# Altium PCB QV-601-Contril.pcbdoc (part 1 of 2)
Units mm, origin at the board's own origin, x right, y up, seen from the top; angles counter-clockwise.
Board outline 150.03 x 60.03 mm, 2 copper layers (TOP, BOTTOM), stack 0.264 mm thick; 44 components, 19 nets, 132 pads, 668 vias.
Unrouted connection lines stored in the file: 3.
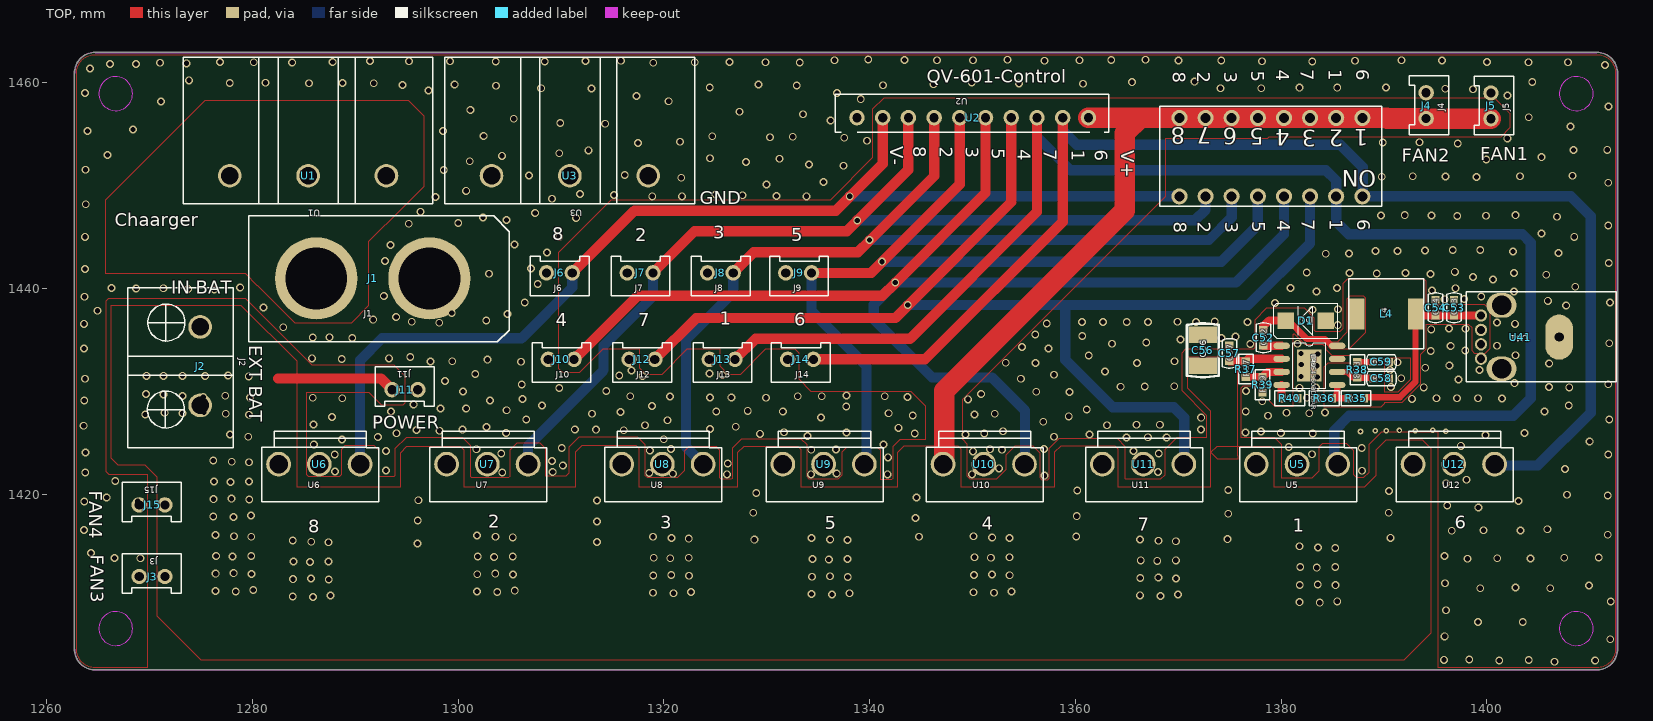
[diagram p0: TOP view]
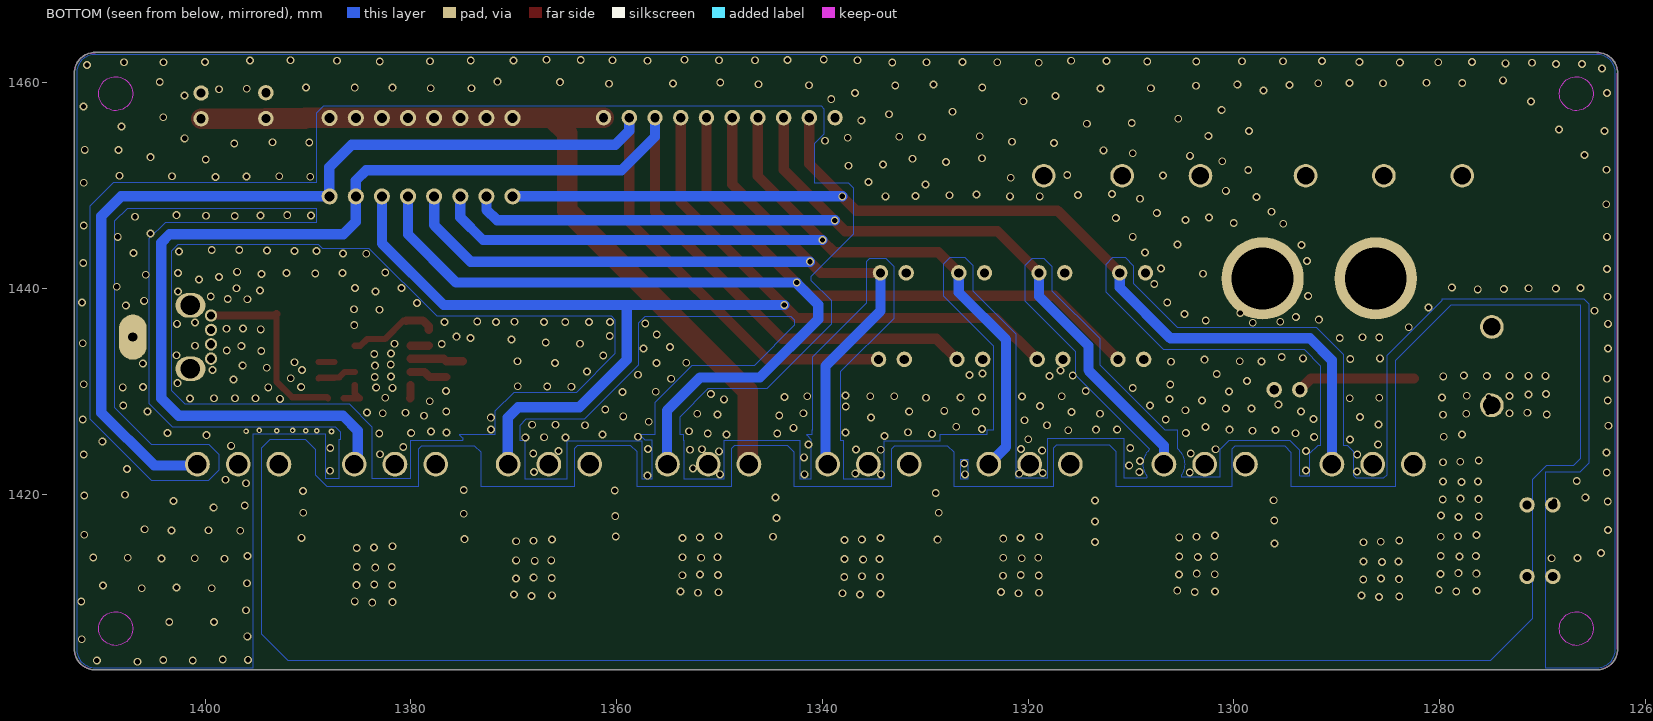
[diagram p1: BOTTOM view, seen from below]

## Layer stack, top to bottom
Top Solder: solder mask 0.0102, Solder Resist, Dk 3.5
TOP: signal copper 0.0305
Dielectric 1: core 0.2032, FR-4, Dk 4.5
BOTTOM: signal copper 0.0305
Bottom Solder: solder mask 0.0102, Solder Resist, Dk 3.5

## Board outline
1262.692,1404.949 ccw(c1264.705,1404.949) 1264.705,1402.936 1410.705,1402.936 ccw(c1410.705,1404.949) 1412.717,1404.949 1412.717,1460.949 ccw(c1410.705,1460.949) 1410.705,1462.962 1264.705,1462.962 ccw(c1264.705,1460.949) 1262.692,1460.949

## Design rules (kind name [scope] priority, off if disabled: settings)
AssemblyTestPointUsage [All] p0: scope1count=1 scope1_0_kind=Board scope1_0_value=Board scope2count=1 scope2_0_kind=Board scope2_0_value=Board commentlength=0
AssemblyTestpoint [All] p0: scope1count=1 scope1_0_kind=Board scope1_0_value=Board scope2count=1 scope2_0_kind=Board scope2_0_value=Board commentlength=0
Clearance [All] p0: scope1count=1 scope1_0_kind=Board scope1_0_value=Board scope2count=1 scope2_0_kind=Board scope2_0_value=Board commentlength=0 gap=0.254
Clearance [All] p1: gap=0.254 ignorepadtopadclearanceinfootprint=FALSE except(0: Arc-Hole Track-Hole SMDPad-Hole THPad-Hole Via-Hole Fill-Hole Poly-Hole Region-Hole Text-Hole)
ComponentClearance [All] p0: scope1count=1 scope1_0_kind=Board scope1_0_value=Board scope2count=1 scope2_0_kind=Board scope2_0_value=Board commentlength=0 gap=0.254 collisioncheckmode=3
DiffPairsRouting [All] p0: scope1count=1 scope1_0_kind=Board scope1_0_value=Board scope2count=1 scope2_0_kind=Board scope2_0_value=Board commentlength=0
FabricationTestPointUsage [All] p0: scope1count=1 scope1_0_kind=Board scope1_0_value=Board scope2count=1 scope2_0_kind=Board scope2_0_value=Board commentlength=0 valid=0 allowmultiple=FALSE
FabricationTestpoint [All] p0: scope1count=1 scope1_0_kind=Board scope1_0_value=Board scope2count=1 scope2_0_kind=Board scope2_0_value=Board commentlength=0 side=3 testpointundercomponent=TRUE minsize=1.016 maxsize=2.54 preferedsize=1.524 minholesize=0 maxholesize=1.016 preferedholesize=0.813 testpointgrid=0.025
FanoutControl Fanout_Default [All] p0: scope1count=1 scope1_0_kind=Board scope1_0_value=Board scope2count=1 scope2_0_kind=Board scope2_0_value=Board commentlength=30 // Fanout_Default (Default Rule)
FanoutControl Fanout_Small [All] p0 off: scope1count=1 scope1_0_kind=Board scope1_0_value=Board scope2count=1 scope2_0_kind=Board scope2_0_value=Board commentlength=84 // Protel DXP Scope 1 Expression Was: (CompPinCount < 5)   Fanout_Small (Default Rule)
FanoutControl Fanout_SOIC [All] p0 off: scope1count=1 scope1_0_kind=Board scope1_0_value=Board scope2count=1 scope2_0_kind=Board scope2_0_value=Board commentlength=71 // Protel DXP Scope 1 Expression Was: IsSOIC   Fanout_SOIC (Default Rule)
FanoutControl Fanout_LCC [All] p0 off: scope1count=1 scope1_0_kind=Board scope1_0_value=Board scope2count=1 scope2_0_kind=Board scope2_0_value=Board commentlength=69 // Protel DXP Scope 1 Expression Was: IsLCC   Fanout_LCC (Default Rule)
FanoutControl Fanout_BGA [All] p0 off: scope1count=1 scope1_0_kind=Board scope1_0_value=Board scope2count=1 scope2_0_kind=Board scope2_0_value=Board commentlength=69 // Protel DXP Scope 1 Expression Was: IsBGA   Fanout_BGA (Default Rule)
Height [All] p0: scope1count=1 scope1_0_kind=Board scope1_0_value=Board scope2count=1 scope2_0_kind=Board scope2_0_value=Board commentlength=0
HoleSize [All] p0: scope1count=1 scope1_0_kind=Board scope1_0_value=Board scope2count=1 scope2_0_kind=Board scope2_0_value=Board commentlength=0 absolutevalues=TRUE maxlimit=2.54 minlimit=0.025 maxpercent=80.000 minpercent=20.000
HoleToHoleClearance [All] p0: scope1count=1 scope1_0_kind=Board scope1_0_value=Board scope2count=1 scope2_0_kind=Board scope2_0_value=Board commentlength=0
LayerPairs [All] p0: scope1count=1 scope1_0_kind=Board scope1_0_value=Board scope2count=1 scope2_0_kind=Board scope2_0_value=Board commentlength=0 enforce=TRUE
MinimumSolderMaskSliver [All] p0: scope1count=1 scope1_0_kind=Board scope1_0_value=Board scope2count=1 scope2_0_kind=Board scope2_0_value=Board commentlength=0
NetAntennae [All] p0: scope1count=1 scope1_0_kind=Board scope1_0_value=Board scope2count=1 scope2_0_kind=Board scope2_0_value=Board commentlength=0
PasteMaskExpansion [All] p0: scope1count=1 scope1_0_kind=Board scope1_0_value=Board scope2count=1 scope2_0_kind=Board scope2_0_value=Board commentlength=0 expansion=0
PlaneClearance [All] p0: scope1count=1 scope1_0_kind=Board scope1_0_value=Board scope2count=1 scope2_0_kind=Board scope2_0_value=Board commentlength=0 clearance=0.508
PlaneConnect [All] p0: scope1count=1 scope1_0_kind=Board scope1_0_value=Board scope2count=1 scope2_0_kind=Board scope2_0_value=Board commentlength=0 planeconnectstyle=Direct reliefexpansion=0.508 reliefentries=4 reliefconductorwidth=0.254 reliefairgap=0.254
PlaneConnect [All] p1: planeconnectstyle=Direct reliefexpansion=0.508 reliefentries=4 reliefconductorwidth=0.254 reliefairgap=0.254
PolygonConnect [All] p0: scope1count=1 scope1_0_kind=Board scope1_0_value=Board scope2count=1 scope2_0_kind=Board scope2_0_value=Board commentlength=0 connectstyle=Direct reliefconductorwidth=0.254 reliefentries=4 polygonreliefangle="90 Angle"
PolygonConnect [All] p1: connectstyle=Direct reliefconductorwidth=0.254 reliefentries=4 polygonreliefangle="90 Angle" airgapwidth=0.254
RoutingCorners [All] p0: scope1count=1 scope1_0_kind=Board scope1_0_value=Board scope2count=1 scope2_0_kind=Board scope2_0_value=Board commentlength=0 cornerstyle=45-Degree minsetback=2.54 maxsetback=2.54
RoutingLayers [All] p0: scope1count=1 scope1_0_kind=Board scope1_0_value=Board scope2count=1 scope2_0_kind=Board scope2_0_value=Board commentlength=0 top layer=Automatic bottom layer=Automatic
RoutingPriority [All] p0: scope1count=1 scope1_0_kind=Board scope1_0_value=Board scope2count=1 scope2_0_kind=Board scope2_0_value=Board commentlength=0
RoutingTopology [All] p0: scope1count=1 scope1_0_kind=Board scope1_0_value=Board scope2count=1 scope2_0_kind=Board scope2_0_value=Board commentlength=0 topology=Shortest
RoutingVias [All] p0: scope1count=1 scope1_0_kind=Board scope1_0_value=Board scope2count=1 scope2_0_kind=Board scope2_0_value=Board commentlength=0 holewidth=0.711 width=1.27 viastyle="Through Hole" minholewidth=0.711 minwidth=1.27 maxholewidth=0.711 maxwidth=1.27
RoutingVias [All] p1: holewidth=0.711 width=1.27 viastyle="Through Hole" minholewidth=0.711 minwidth=1.27 maxholewidth=0.711 maxwidth=1.27
ShortCircuit [All] p0: scope1count=1 scope1_0_kind=Board scope1_0_value=Board scope2count=1 scope2_0_kind=Board scope2_0_value=Board commentlength=0 allowed=FALSE
SilkToBoardRegionClearance [All] p0: scope1count=1 scope1_0_kind=Board scope1_0_value=Board scope2count=1 scope2_0_kind=Board scope2_0_value=Board commentlength=0
SilkToSilkClearance [All] p0: scope1count=1 scope1_0_kind=Board scope1_0_value=Board scope2count=1 scope2_0_kind=Board scope2_0_value=Board commentlength=0
SilkToSolderMaskClearance [All] p0 off: scope1count=1 scope1_0_kind=Board scope1_0_value=Board scope2count=1 scope2_0_kind=Board scope2_0_value=Board commentlength=44 // Protel DXP Scope 1 Expression Was: IsPad
SolderMaskExpansion [All] p0: scope1count=1 scope1_0_kind=Board scope1_0_value=Board scope2count=1 scope2_0_kind=Board scope2_0_value=Board commentlength=0 expansion=0.102
SolderMaskExpansion [All] p1: expansion=0.102
UnRoutedNet [All] p0: scope1count=1 scope1_0_kind=Board scope1_0_value=Board scope2count=1 scope2_0_kind=Board scope2_0_value=Board commentlength=0
UnpouredPolygon [All] p0: scope1count=1 scope1_0_kind=Board scope1_0_value=Board scope2count=1 scope2_0_kind=Board scope2_0_value=Board commentlength=0
Width [All] p0: scope1count=1 scope1_0_kind=Board scope1_0_value=Board scope2count=1 scope2_0_kind=Board scope2_0_value=Board commentlength=0 maxlimit=0.254 minlimit=0.254 preferedwidth=0.254
Width [All] p1: maxlimit=0.254 minlimit=0.254 preferedwidth=0.254 impedancedriven=TRUE minimp=72.060000 maximp=72.060000 favimp=72.060000
29 further rules are at their usual default settings.

## Components (designator, comment, footprint, x,y, rotation, side; value= is the part's Value field where it differs from the comment)
C52 "CAP NP_C0603_100NF" C0603 1378.275,1435.225 r90 top
C53 "CAP NP_C0603_10UF/10V" C0603 1396.817,1438.146 r90 top
C54 "CAP NP_C0603_10UF/10V" C0603 1395.013,1438.146 r90 top
C56 "CAP NP_C1210_10UF/50V" C1210 1372.407,1433.998 r90 top
C57 "CAP NP_C0603_100NF" C0603 1374.973,1433.701 r90 top
C58 "CAP NP_C0603_100NF" C0603 1389.755,1431.262 r180 top
C59 "CAP NP_C0603_100NF" C0603 1389.755,1432.863 r180 top
D1 "SS54_SMA_SS34" SMA 1382.394,1436.876 r180 top
J1 "CON2_XT90PBM_XT90PB-M" XT90PBM 1286.207,1440.986 r0 top
J2 "CON2_DBT50G-7R62-2P1_DBT50G-7.6" DBT50G-7R62-2P1 1274.922,1436.266 r270 top
J3 "CON2_XH2R54-21_ZX-XH2.54-2PZZ" XH2R54-21 1271.493,1412.009 r180 top
J4 "CON2_XH2R54-21_ZX-XH2.54-2PZZ" XH2R54-21 1394.099,1456.535 r90 top
J5 "CON2_XH2R54-21_ZX-XH2.54-2PZZ" XH2R54-21 1400.398,1456.51 r90 top
J6 "CON2_XH2R54-21_ZX-XH2.54-2PZZ" XH2R54-21 1308.592,1441.524 r0 top
J7 "CON2_XH2R54-21_ZX-XH2.54-2PZZ" XH2R54-21 1316.44,1441.524 r0 top
J8 "CON2_XH2R54-21_ZX-XH2.54-2PZZ" XH2R54-21 1324.238,1441.524 r0 top
J9 "CON2_XH2R54-21_ZX-XH2.54-2PZZ" XH2R54-21 1331.858,1441.524 r0 top
J10 "CON2_XH2R54-21_ZX-XH2.54-2PZZ" XH2R54-21 1308.769,1433.117 r0 top
J11 "CON2_XH2R54-21_ZX-XH2.54-2PZZ" XH2R54-21 1296.08,1430.17 r180 top
J12 "CON2_XH2R54-21_ZX-XH2.54-2PZZ" XH2R54-21 1316.618,1433.117 r0 top
J13 "CON2_XH2R54-21_ZX-XH2.54-2PZZ" XH2R54-21 1324.416,1433.117 r0 top
J14 "CON2_XH2R54-21_ZX-XH2.54-2PZZ" XH2R54-21 1332.036,1433.117 r0 top
J15 "CON2_XH2R54-21_ZX-XH2.54-2PZZ" XH2R54-21 1271.493,1418.969 r180 top
L4 "JLSHC0630_3R3M_L0650_CYA0650-22" L0650 1387.368,1437.536 r90 top
R35 "R2_R0603_42.2K" R0603 1387.292,1429.332 r0 top
R36 "R2_R0603_8K" R0603 1384.193,1429.332 r0 top
R37 "R2_R0603_51K" R0603 1376.573,1432.177 r90 top
R38 "R2_R0603_10K" R0603 1387.419,1432.101 r270 top
R39 "R2_R0603_8K" R0603 1378.198,1430.653 r90 top
R40 "R2_R0603_160K" R0603 1380.84,1429.332 r180 top
U1 "CON3_DBT50G-7R62-3P1_DBT50G-7.6" DBT50G-7R62-3P1 1285.412,1452.073 r180 top
U2 "CON10_XH2R54-10P1_ZX-XH2.54-10P" XH2R54-10P1 1361.27,1456.612 r180 top
U3 "CON3_DBT50G-7R62-3P1_DBT50G-7.6" DBT50G-7R62-3P1 1310.863,1452.073 r180 top
U5 "CON3_VH3R96-3P1_VH3.96-3P ZZ" VH3R96-3P1 1381.551,1422.931 r0 top
U6 "CON3_VH3R96-3P1_VH3.96-3P ZZ" VH3R96-3P1 1286.504,1422.931 r0 top
U7 "CON3_VH3R96-3P1_VH3.96-3P ZZ" VH3R96-3P1 1302.837,1422.931 r0 top
U8 "CON3_VH3R96-3P1_VH3.96-3P ZZ" VH3R96-3P1 1319.855,1422.931 r0 top
U9 "CON3_VH3R96-3P1_VH3.96-3P ZZ" VH3R96-3P1 1335.526,1422.931 r0 top
U10 "CON3_VH3R96-3P1_VH3.96-3P ZZ" VH3R96-3P1 1351.097,1422.931 r0 top
U11 "CON3_VH3R96-3P1_VH3.96-3P ZZ" VH3R96-3P1 1366.591,1422.931 r0 top
U12 "CON3_VH3R96-3P1_VH3.96-3P ZZ" VH3R96-3P1 1396.791,1422.931 r0 top
U40 "TPS54360BDDAR_SOIC8E_TPS54360BD" SOIC8E 1382.753,1432.532 r270 top
U41 "USB2R0_CECHA_USB2R0_CECHA_USB2R" USB2R0_CECHA 1399.433,1433.184 r180 top
? "DIP_8P_TA-08R1_TA-08R" TA-08R1 1387.901,1448.966 r180 top

## Footprints (in the part's own frame and the unit in brackets; to place one, negate y for a bottom-side part, rotate by r counter-clockwise, add the part's x,y. Pads: shape width x height; smd on the part's side, far side on the other; paste and mask are expansions set on the pad)
C0603 [mil] "C0603"
  rect 30x32 smd: 1(-30,0) 2(30,0)
  silkscreen extent -57,-28 57,28
C1210 [mm] "C1210"
  rect 1.6x2.7 smd: 1(-1.516,0) 2(1.516,0)
  silkscreen extent -2.61,-1.55 2.61,1.55
DBT50G-7R62-2P1 [mm] "DBT50G-7R62-2P1"
  round 2.3 / inner round 1.524 / far side round 2.3 hole 1.7: 1(0,0) 2(7.62,0)
  silkscreen extent -3.81,-7.04 11.73,3.23
DBT50G-7R62-3P1 [mm] "DBT50G-7R62-3P1"
  round 2.3 / inner round 1.524 / far side round 2.3 hole 1.7: 1(-7.62,1.1) 2(0,1.1) 3(7.62,1.1)
  silkscreen extent -12.14,-10.41 12.14,3.81
L0650 [mm] "L0650"
  rect 3x1.5 smd: 1(0,0) 2(0,-5.7)
  silkscreen extent -3.4,-6.5 3.4,0.8
R0603 [mil] "R0603"
  rect 30x32 smd: 1(-30,0) 2(30,0)
  silkscreen extent -57,-28 57,28
SMA [mm] "SMA"
  rect 1.6x1.6 smd: 1(-1.951,0) 2(1.951,0)
  silkscreen extent -3.1,-1.7 3.1,1.7
SOIC8E [mm] "SOIC8E"
  oval 0.6x1.6 smd: 1(-1.905,-2.7) 2(-0.635,-2.7) 3(0.635,-2.7) 4(1.905,-2.7) 5(1.905,2.7) 6(0.635,2.7) 7(-0.635,2.7) 8(-1.905,2.7)
  rect 3.1x2.4 smd: 9(0,0)
  silkscreen extent -2.2,-1.6 2.2,1.6
TA-08R1 [mm] "TA-08R1"
  round 1.57 / inner round 1.524 / far side round 1.57 hole 0.97: 1(0,-7.62) 2(2.54,-7.62) 3(5.08,-7.62) 4(7.62,-7.62) 5(10.16,-7.62) 6(12.7,-7.62) 7(15.24,-7.62) 8(17.78,-7.62) 9(17.78,0) 10(15.24,0) 11(12.7,0) 12(10.16,0) 13(7.62,0) 14(5.08,0) 15(2.54,0) 16(0,0)
  silkscreen extent -1.91,-8.74 19.71,0.97
USB2R0_CECHA [mm] "USB2R0_CECHA"
  round 1.2 / inner round 1.524 / far side round 1.2 hole 0.8: 1(0,-4.2) 2(0,-2.8) 3(0,-1.4) 4(0,0)
  oval 2.9x2.4 / inner round 1.524 / far side oval 2.9x2.4 hole 1.9: 5(-2,0.98) 6(-2,-5.18)
  oval 2.7x4.4 / inner round 1.524 / far side oval 2.7x4.4 hole 0.9: 7(-7.6,-2.1)
  silkscreen extent -13.16,-6.53 1.45,2.26
VH3R96-3P1 [mm] "VH3R96-3P1"
  round 2.4 / inner round 1.524 / far side round 2.4 hole 1.8: 1(-3.96,0) 2(0,0) 3(3.96,0)
  silkscreen extent -5.59,-3.66 5.79,3.2
XH2R54-10P1 [mm] "XH2R54-10P1"
  round 1.5 / inner round 1.524 / far side round 1.5 hole 0.9: 1(0,0) 2(2.5,0) 3(5,0) 4(7.5,0) 5(10,0) 6(12.5,0) 7(15,0) 8(17.5,0) 9(20,0) 10(22.5,0)
  silkscreen extent -1.98,-2.26 24.59,1.42
XH2R54-21 [mm] "XH2R54-21"
  round 1.5 / inner round 1.524 / far side round 1.5 hole 0.9: 1(0,0) 2(2.5,0)
  silkscreen extent -1.57,-2.21 4.14,1.63
XT90PBM [mm] "XT90PBM"
  round 8 / inner round 1.524 / far side round 8 hole 6: 1(0,0) 2(11,0)
  silkscreen extent -6.55,-6.17 18.75,6.07

## Via types
v1: diameter 0.762, hole 0.508, TOP to BOTTOM, 661 vias
v2: diameter 0.54, hole 0.254, TOP to BOTTOM, 7 vias

## Nets (pads, with @x,y where several pads share a name; then routed paths per layer and width w, separated by ;. In a path a pad name is that pad's centre, name@x,y a point inside that pad or via, vN(x,y) a via of type N, cw(c..) or ccw(c..) an arc to the next point about the centre after c; other vN are vias at no path point)
1.2: ?.11 J8.2 U2.7 U8.3 | length 88.5
  TOP w1: J8.2@1326.738,1441.524 1328.745,1443.531 1338.854,1443.531 v1@1339.997,1444.674 ; v1(1339.997,1444.724) v1@1339.997,1444.674 ; U2.7@1346.27,1456.612 1346.27,1450.947 v1@1339.997,1444.674
  BOTTOM w1: U8.3@1323.815,1422.931 1322.141,1424.605 1322.141,1435.022 1326.738,1439.619 J8.2@1326.738,1441.524 ; v1(1339.997,1444.724) 1372.991,1444.724 1375.201,1446.934 ?.11@1375.201,1448.966
1.4: ?.13 J10.2 U2.5 U10.3 | length 125.5
  TOP w1: J10.2@1311.269,1433.117 1317.442,1439.289 1341.241,1439.289 v1@1342.486,1440.533 ; v1(1342.486,1440.584) v1@1342.486,1440.533 ; U2.5@1351.27,1456.612 1351.27,1449.317 v1@1342.486,1440.533
  BOTTOM w1: U10.3@1355.057,1422.931 1355.11,1422.984 1355.11,1428.138 1351.884,1431.364 1346.067,1431.364 1340.412,1437.02 1340.412,1438.434 1342.486,1440.508 v1(1342.486,1440.584) 1375.582,1440.584 1380.281,1445.283 ?.13@1380.281,1448.966
1.5: ?.12 J9.2 U2.6 U9.3 | length 86.2
  TOP w1: J9.2@1334.358,1441.524 1340.149,1441.524 v1@1341.216,1442.591 ; v1(1341.216,1442.616) v1@1341.216,1442.591 ; U2.6@1348.77,1456.612 1348.77,1450.145 v1@1341.216,1442.591
  BOTTOM w1: J9.2@1334.358,1441.524 1334.358,1437.816 1339.692,1432.482 1339.692,1423.137 U9.3@1339.486,1422.931 ; v1(1341.216,1442.616) 1374.185,1442.616 1377.741,1446.172 ?.12@1377.741,1448.966
2.4: ?.16 J14.2 U2.2 U12.3 | length 128.3
  TOP w1: J14.2@1334.536,1433.117 1345.382,1433.117 1358.77,1446.505 U2.2@1358.77,1456.612
  BOTTOM w1: U2.2@1358.77,1456.612 1358.77,1455.339 1360.139,1453.97 1385.768,1453.97 1387.927,1451.811 1387.927,1448.992 ?.16@1387.901,1448.966 1408.17,1448.966 1410.101,1447.036 1410.101,1427.935 1404.97,1422.804 1400.878,1422.804 U12.3@1400.751,1422.931
5.2: ?.14 J12.2 U2.4 U11.3 | length 119.2
  TOP w1: J12.2@1319.118,1433.117 1323.131,1437.13 1342.486,1437.13 v1@1343.705,1438.349 ; v1(1343.705,1438.4) v1@1343.705,1438.349 ; U2.4@1353.77,1456.612 1353.77,1448.414 v1@1343.705,1438.349
  BOTTOM w1: v1(1343.705,1438.4) 1359.021,1438.4 ; U11.3@1370.551,1422.931 1370.578,1422.959 1370.578,1427.452 1369.562,1428.468 1363.619,1428.468 1359.021,1433.066 1359.021,1438.4 ; ?.14@1382.821,1448.966 1382.821,1444.394 1376.827,1438.4 1359.021,1438.4
5.8: ?.9 J6.2 U2.9 U6.3 | length 106.2
  TOP w1: J6.2@1311.092,1441.524 1317.137,1447.569 1336.695,1447.569 v1@1338.066,1448.941 ; v1(1338.066,1448.966) v1@1338.066,1448.941 ; U2.9@1341.27,1456.612 1341.27,1452.144 v1@1338.066,1448.941
  BOTTOM w1: U6.3@1290.464,1422.931 1290.464,1433.038 1292.6,1435.174 1306.164,1435.174 1311.092,1440.102 J6.2@1311.092,1441.524 ; v1(1338.066,1448.966) ?.9@1370.121,1448.966
433: ?.15 J13.2 U2.3 U5.3 | length 139.9
  TOP w1: J13.2@1326.916,1433.117 1328.922,1435.123 1343.934,1435.123 1356.27,1447.459 U2.3@1356.27,1456.612
  BOTTOM w1: U2.3@1356.27,1456.612 1356.27,1454.766 1359.529,1451.506 1384.361,1451.506 1385.361,1450.506 ?.15@1385.361,1448.966 1385.361,1446.502 1386.58,1445.283 1403.471,1445.283 1404.284,1444.47 1404.284,1429.341 1402.573,1427.63 1386.606,1427.63 1385.158,1426.182 1385.158,1423.284 U5.3@1385.511,1422.931
900: ?.10 J7.2 U2.8 U7.3 | length 93.3
  TOP w1: J7.2@1318.94,1441.524 1322.979,1445.563 1337.787,1445.563 v1@1338.803,1446.579 ; v1(1338.803,1446.629) v1@1338.803,1446.579 ; U2.8@1343.77,1456.612 1343.77,1451.545 v1@1338.803,1446.579
  BOTTOM w1: U7.3@1306.797,1422.931 1306.797,1424.732 1314.14,1432.075 1314.14,1434.463 1318.94,1439.263 J7.2@1318.94,1441.524 ; v1(1338.803,1446.629) 1371.62,1446.629 1372.661,1447.671 ?.10@1372.661,1448.966
GND: C53.2 C54.2 C56.2 C57.2 C58.1 C59.1 D1.1 J1.2 J3.2 J4.2 J5.2 J6.1 J7.1 J8.1 J9.1 J10.1 J11.1 J12.1 J13.1 J14.1 J15.2 R36.1 R39.1 R40.1 U2.10 U3.1 U3.2 U3.3 U5.2 U6.2 U7.2 U8.2 U9.2 U10.2 U11.2 U12.2 U40.7 U40.9 U41.4 U41.5 U41.6 U41.7
  other v1: 1406.57,1403.729 1401.211,1403.83 1410.533,1403.83 1404.081,1403.881 1395.826,1403.907 1398.29,1403.932 1412.006,1405.913 1395.902,1406.193 1399.153,1407.59 1403.497,1407.59 1396.029,1408.733 1412.057,1409.571 1399.357,1410.866 1406.164,1410.866 1402.786,1410.942 1409.923,1411.146 1395.928,1411.349 1398.112,1413.736 1404.259,1413.762 1269.105,1413.787 1401.008,1413.787 1266.591,1413.813 1407.535,1413.838 1410.888,1413.863 1395.877,1413.99 1264.305,1414.295 1411.752,1416.073 1396.588,1416.454 1403.268,1416.48 1399.687,1416.505 1263.619,1416.53 1405.884,1416.607 1399.179,1418.715 1396.156,1418.918 1263.644,1419.299 1268.851,1419.324 1403.09,1419.35 1265.829,1419.68 1411.752,1419.883 1407.789,1419.959 1396.029,1421.077 1266.667,1421.28 1398.036,1421.407 1356.989,1421.814 1326.128,1421.941 1334.307,1421.941 1341.749,1421.941 1349.954,1421.941 1320.871,1421.991 1336.796,1422.017 1318.585,1422.068 1263.746,1422.118 1304.284,1422.118 1309.187,1422.169 1368.038,1422.169 1288.028,1422.22 1387.876,1422.296 1292.981,1422.322 1407.612,1422.449 1352.57,1422.525 1310.177,1422.804 1326.205,1422.982 1309.11,1423.236 1341.775,1423.592 1288.003,1423.871 1411.803,1423.871 1382.999,1423.896 1304.183,1423.973 1368.115,1423.973 1263.771,1424.074 1350.055,1424.176 1292.981,1424.201 1365.651,1424.201 1318.635,1424.252 1334.333,1424.328 1352.875,1424.328 1336.72,1424.354 1301.77,1424.379 1351.706,1424.379 1320.693,1424.404 1356.964,1424.404 1310.076,1424.506 1387.85,1424.506 1380.738,1424.608 1397.477,1424.709 1285.971,1424.836 1341.343,1424.836 1409.999,1425.141 1288.714,1425.319 1319.982,1425.344 1364.965,1425.522 1368.877,1425.522 1367.048,1425.547 1292.194,1425.573 1357.929,1425.598 1333.952,1425.674 1399.865,1425.751 1349.319,1425.827 1361.384,1425.827 1329.354,1425.878 1344.391,1425.903 1351.147,1425.903 1383.075,1425.903 1293.997,1425.928 1304.665,1425.954 1379.976,1425.954 1403.675,1425.954 1337.762,1426.005 1376.547,1426.005 1331.666,1426.03 1378.046,1426.106 1352.976,1426.132 1298.188,1426.182 1316.095,1426.233 1295.953,1426.259 1300.424,1426.284 1313.403,1426.284 1311.346,1426.309 1372.204,1426.309 1324.477,1426.36 1342.816,1426.462 1302.76,1426.538 1326.992,1426.563 1263.594,1426.665 1318.153,1426.716 1363.085,1426.716 1365.956,1426.767 1368.216,1426.767 1285.946,1426.792 1356.888,1427.046 1320.363,1427.198 1306.621,1427.275 1411.904,1427.275 1292.27,1427.325 1372.229,1427.452 1335.272,1427.478 1287.724,1427.503 1359.352,1427.579 1378.732,1427.63 1344.188,1427.656 1350.208,1427.757 1313.022,1427.833 1352.163,1427.833 1341.851,1427.884 1382.745,1427.884 1380.535,1427.935 1384.269,1427.96 1315.791,1428.011 1325.087,1428.037 1293.464,1428.062 1331.564,1428.062 1376.573,1428.062 1405.605,1428.062 1328.16,1428.113 1304.716,1428.164 1361.104,1428.24 1298.29,1428.341 1300.779,1428.341 1337.736,1428.545 1318.839,1428.595 1308.145,1428.621 1407.967,1428.621 1295.674,1428.722 1378.173,1429.053 1263.644,1429.129 1303.091,1429.129 1349.573,1429.23 1306.266,1429.256 1392.727,1429.281 1401.465,1429.307 1288.74,1429.332 1395.115,1429.332 1397.096,1429.332 1399.153,1429.332 1285.869,1429.383 1329.938,1429.383 1382.491,1429.383 1324.477,1429.408 1326.56,1429.408 1343.68,1429.459 1320.591,1429.51 1316.73,1429.535 1333.012,1429.535 1335.349,1429.535 1341.47,1429.535 1337.762,1429.611 1350.843,1429.764 1359.428,1429.942 1356.202,1429.967 1300.474,1429.992 1314.394,1430.043 1376.598,1430.043 1309.822,1430.323 1381.78,1430.348 1383.38,1430.373 1393.87,1430.399 1408.018,1430.399 1390.67,1430.424 1406.037,1430.424 1364.406,1430.45 1366.743,1430.475 1369.613,1430.5 1306.189,1430.678 1411.803,1430.704 1402.684,1430.805 1298.722,1431.008 1397.248,1431.161 1263.721,1431.237 1354.703,1431.237 1391.686,1431.288 1383.515,1431.415 1381.94,1431.44 1317.924,1431.491 1315.664,1431.542 1325.697,1431.593 1357.929,1431.618 1301.668,1431.694 1324.427,1431.745 1362.882,1431.948 1316.857,1432.024 1390.594,1432.075 1399.28,1432.075 1394.023,1432.304 1383.489,1432.507 1396.359,1432.532 1381.965,1432.609 1406.062,1432.71 1356.126,1432.761 1366.006,1432.761 1353.23,1432.786 1391.305,1432.837 1306.113,1432.888 1297.325,1432.913 1299.433,1432.939 1369.639,1432.939 1302.862,1433.091 1288.689,1433.142 1285.793,1433.218 1293.286,1433.218 1295.344,1433.345 1361.307,1433.498 1402.786,1433.523 1383.565,1433.65 1381.94,1433.675 1394.556,1433.929 1397.909,1433.98 1263.619,1434.183 1357.396,1434.183 1354.805,1434.31 1396.486,1434.412 1400.982,1434.437 1377.005,1434.615 1363.568,1434.641 1381.602,1434.641 1411.904,1434.691 1366.895,1434.768 1370.223,1435.047 1289.705,1435.199 1374.211,1435.199 1285.869,1435.25 1287.495,1435.276 1375.582,1435.326 1360.672,1435.377 1356.1,1435.53 1394.607,1436.038 1397.934,1436.088 1396.334,1436.114 1282.999,1436.241 1385.514,1436.444 1263.619,1436.571 1402.735,1436.571 1357.218,1436.596 1298.163,1436.673 1400.982,1436.698 1360.647,1436.749 1362.679,1436.749 1364.99,1436.749 1367.073,1436.749 1371.721,1436.749 1376.725,1436.749 1295.496,1436.774 1369.918,1436.774 1373.55,1436.8 1302.735,1436.901 1291.737,1436.977 1293.972,1437.231 1304.792,1437.536 1299.382,1437.638 1264.94,1437.841 1383.05,1437.943 1385.539,1437.993 1281.069,1438.171 1407.713,1438.349 1379.418,1438.603 1306.469,1438.654 1411.98,1438.654 1405.935,1438.806 1395.902,1438.959 1397.807,1438.984 1263.67,1439.213 1399.458,1439.238 1292.778,1439.289 1383.431,1439.721 1402.633,1439.721 1394.683,1439.822 1276.294,1439.924 1273.754,1439.949 1268.699,1440 1271.341,1440.025 1396.969,1440.025 1266.311,1440.051 1380.916,1440.051 1385.437,1440.051 1278.808,1440.102 1408.602,1440.178 1307.739,1440.432 1400.601,1440.889 1398.645,1441.118 1405.783,1441.346 1394.531,1441.422 1302.989,1441.448 1389.298,1441.473 1386.657,1441.524 1392.092,1441.524 1402.633,1441.524 1382.491,1441.575 1396.893,1441.626 1263.721,1441.905 1307.078,1441.956 1411.853,1442.489 1292.88,1442.692 1384.345,1443.378 1386.606,1443.404 1406.977,1443.454 1308.628,1443.505 1402.557,1443.607 1389.171,1443.658 1391.305,1443.658 1393.997,1443.708 1396.69,1443.759 1399.357,1443.759 1293.413,1444.242 1305.478,1444.293 1263.721,1445.029 1309.822,1445.029 1408.501,1445.029 1405.326,1445.359 1411.803,1446.121 1295.191,1446.299 1300.017,1446.375 1304.691,1446.655 1311.473,1446.858 1302.405,1446.909 1406.824,1446.985 1397.121,1447.061 1399.915,1447.087 1389.705,1447.112 1394.632,1447.112 1392.016,1447.137 1402.786,1447.137 1307.485,1447.341 1296.334,1447.468 1263.797,1448.204 1309.136,1448.738 1297.807,1448.915 1318.864,1448.966 1321.76,1448.966 1333.875,1448.966 1330.954,1448.992 1327.652,1449.068 1315.156,1449.093 1325.011,1449.144 1311.854,1449.195 1300.779,1449.5 1329.989,1450.109 1411.803,1450.287 1335.526,1450.363 1321.683,1450.77 1399.001,1450.846 1389.781,1450.871 1395.978,1450.897 1392.803,1450.922 1403.217,1450.922 1408.323,1450.973 1306.875,1450.998 1316.197,1451.049 1298.595,1451.532 1263.771,1451.557 1337.457,1451.938 1334.104,1452.065 1327.983,1452.294 1301.135,1452.37 1399.941,1452.548 1331.234,1452.624 1324.477,1452.675 1405.326,1452.776 1304.259,1452.903 1265.905,1452.979 1309.822,1453.157 1312.666,1453.437 1408.424,1453.462 1411.701,1453.487 1397.172,1454.097 1317.492,1454.148 1389.882,1454.199 1393.464,1454.224 1321.556,1454.275 1339.743,1454.376 1401.998,1454.605 1337.533,1454.656 1330.319,1454.707 1332.529,1454.757 1324.706,1454.808 1302.481,1454.834 1263.975,1455.316 1298.519,1455.316 1268.394,1455.469 1408.145,1455.748 1314.292,1456.027 1309.923,1456.104 1336.212,1456.332 1305.402,1456.51 1404.081,1456.662 1333.52,1456.942 1327.348,1457.196 1301.186,1457.348 1411.828,1457.704 1271.112,1458.186 1320.464,1458.212 1339.133,1458.415 1317.34,1458.72 1402.024,1458.771 1336.822,1458.999 1263.721,1459.025 1297.122,1459.253 1398.671,1459.38 1395.953,1459.431 1312.971,1459.456 1308.069,1459.482 1374.109,1459.482 1378.071,1459.482 1381.78,1459.533 1385.463,1459.533 1324.452,1459.558 1390.213,1459.558 1303.675,1459.71 1332.91,1459.736 1341.292,1459.761 1294.582,1459.787 1299.662,1459.837 1329.202,1459.837 1346.22,1459.863 1360.749,1459.914 1354.526,1459.939 1285.488,1459.964 1291.788,1459.964 1277.792,1459.99 1288.765,1459.99 1281.272,1460.015 1349.928,1460.041 1365.498,1460.066 1404.411,1460.091 1371.594,1460.117 1273.83,1460.244 1264.203,1461.387 1411.498,1461.742 1266.159,1461.844 1268.674,1461.844 1273.601,1461.895 1271.01,1461.946 1318.966,1461.946 1283.863,1461.971 1333.215,1461.971 1280.129,1461.996 1323.004,1461.996 1329.888,1461.996 1404.056,1461.996 1407.891,1461.996 1276.852,1462.022 1287.8,1462.022 1326.382,1462.022 1400.017,1462.022 1303.649,1462.073 1308.425,1462.073 1383.024,1462.073 1295.217,1462.098 1299.204,1462.098 1378.148,1462.098 1291.432,1462.123 1312.387,1462.123 1315.816,1462.149 1356.989,1462.149 1387.19,1462.149 1370.02,1462.174 1374.185,1462.174 1395.648,1462.174 1336.593,1462.2 1346.55,1462.2 1350.055,1462.2 1360.393,1462.2 1391.711,1462.2 1343.4,1462.225 1363.492,1462.225 1353.408,1462.25 1366.819,1462.25 1339.87,1462.276
  other v2: 1387.723,1426.106 1396.029,1426.132 1389.146,1426.182 1390.213,1426.182 1393.057,1426.182 1391.508,1426.208 1394.734,1426.208
N41242: J1.1 U1.1 U1.2 U1.3
N62769: R37.1 R39.2 U40.3 | length 3.7
  TOP w0.8: R37.1@1376.573,1431.415 R39.2@1378.198,1431.415 1378.681,1431.897 U40.3@1380.053,1431.897
N62809: R40.2 U40.4 | length 1.3
  TOP w0.8: U40.4@1380.053,1430.627 1380.053,1429.357 R40.2@1380.078,1429.332
N62825: C52.1 U40.1 | length 1.8
  TOP w0.8: C52.1@1378.275,1434.463 1378.3,1434.437 U40.1@1380.053,1434.437
N62837: C52.2 D1.2 L4.1 U40.8 | length 8.8
  TOP w0.6: D1.2@1380.444,1436.876 1380.738,1436.876 1382.516,1435.098 1384.269,1435.098 1384.929,1434.437 U40.8@1385.453,1434.437
  TOP w0.8: C52.2@1378.275,1435.987 1378.275,1436.342 1378.84,1436.908 1380.411,1436.908 D1.2@1380.444,1436.876
N62937: C58.2 R38.2 U40.6 | length 3.8
  TOP w0.6: U40.6@1385.453,1431.897 1386.428,1431.897 1386.961,1431.364 1387.393,1431.364 R38.2@1387.419,1431.339 1388.917,1431.339 C58.2@1388.993,1431.262
N62993: C59.2 R38.1 | length 1.6
  TOP w0.6: R38.1@1387.419,1432.863 C59.2@1388.993,1432.863
N63043: R35.1 R36.2 U40.5 | length 3.1
  TOP w0.6: U40.5@1385.453,1430.627 1385.453,1429.83 R36.2@1384.955,1429.332 R35.1@1386.53,1429.332